# Altium PCB transmitter.PcbDoc
Units mm, origin at the board's own origin, x right, y up, seen from the top; angles counter-clockwise.
Board outline 78.49 x 58.93 mm, 2 copper layers (Top Layer, Bottom Layer); 17 components, 11 nets, 44 pads, 12 vias.
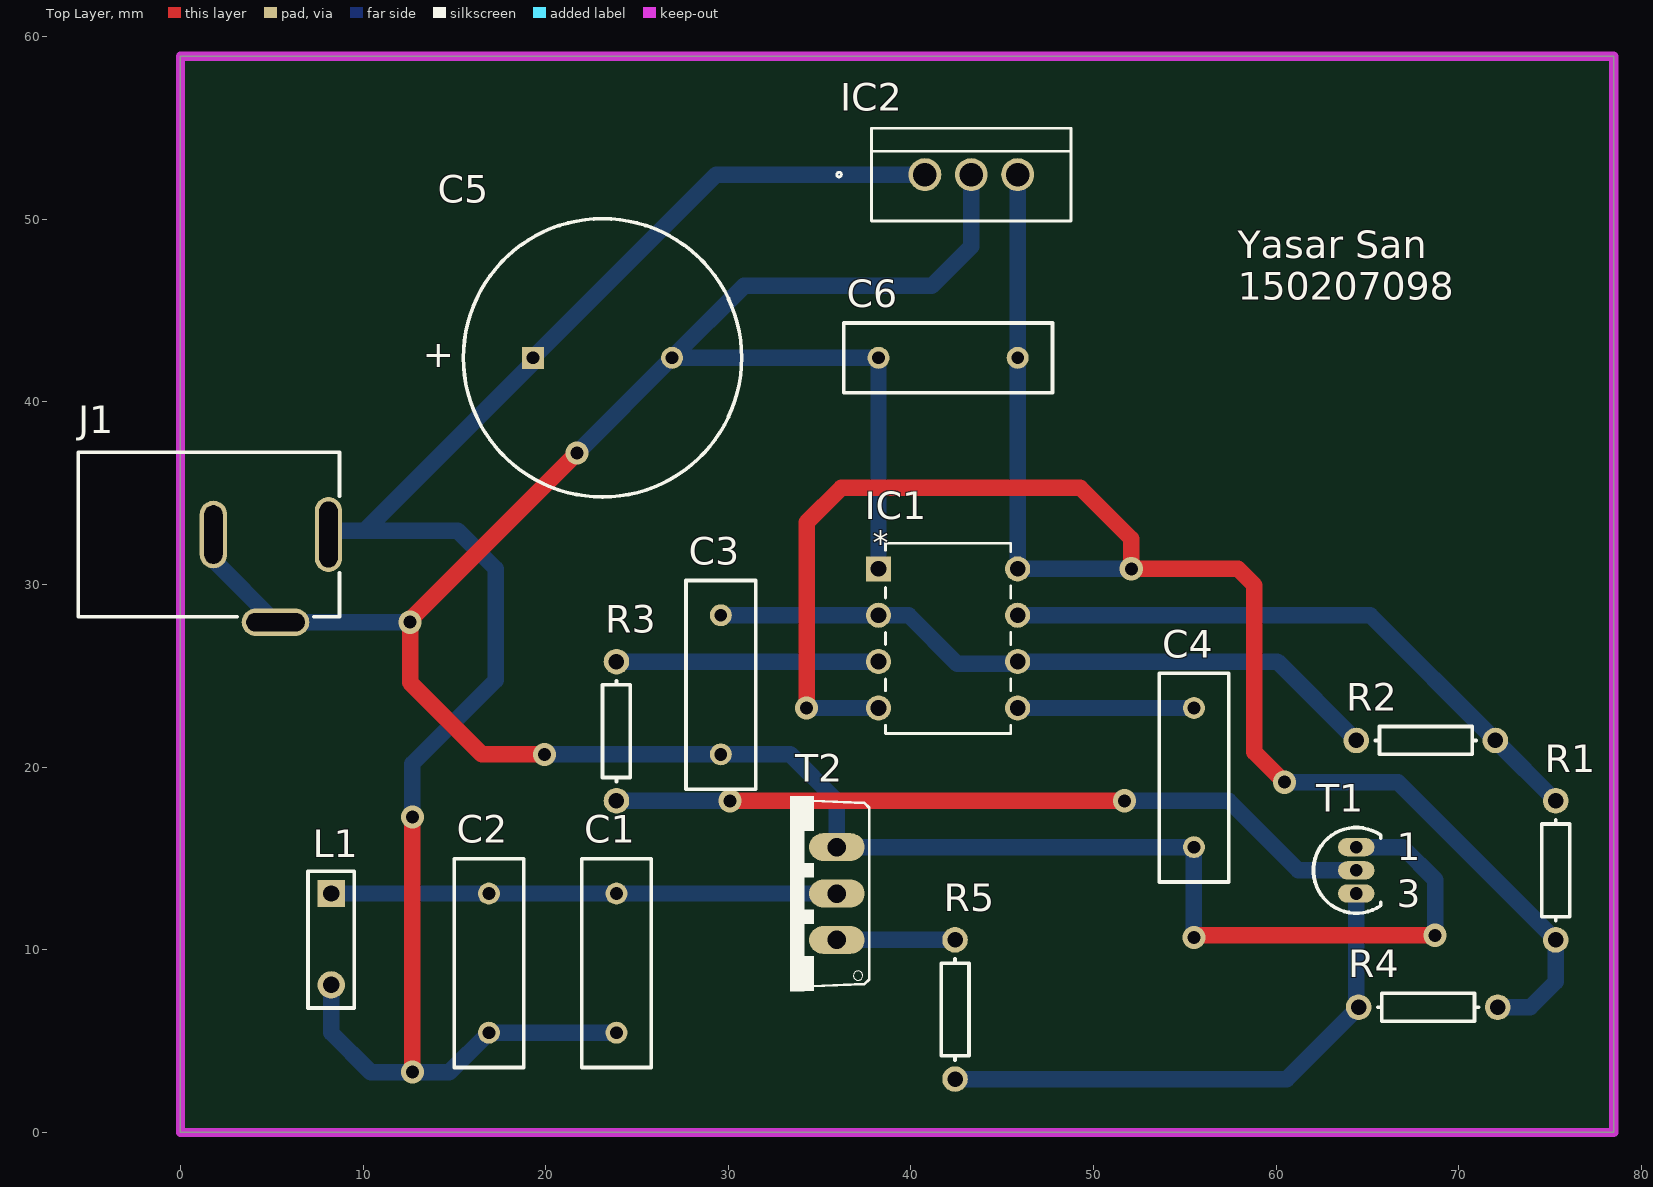
[diagram p0: Top Layer view]
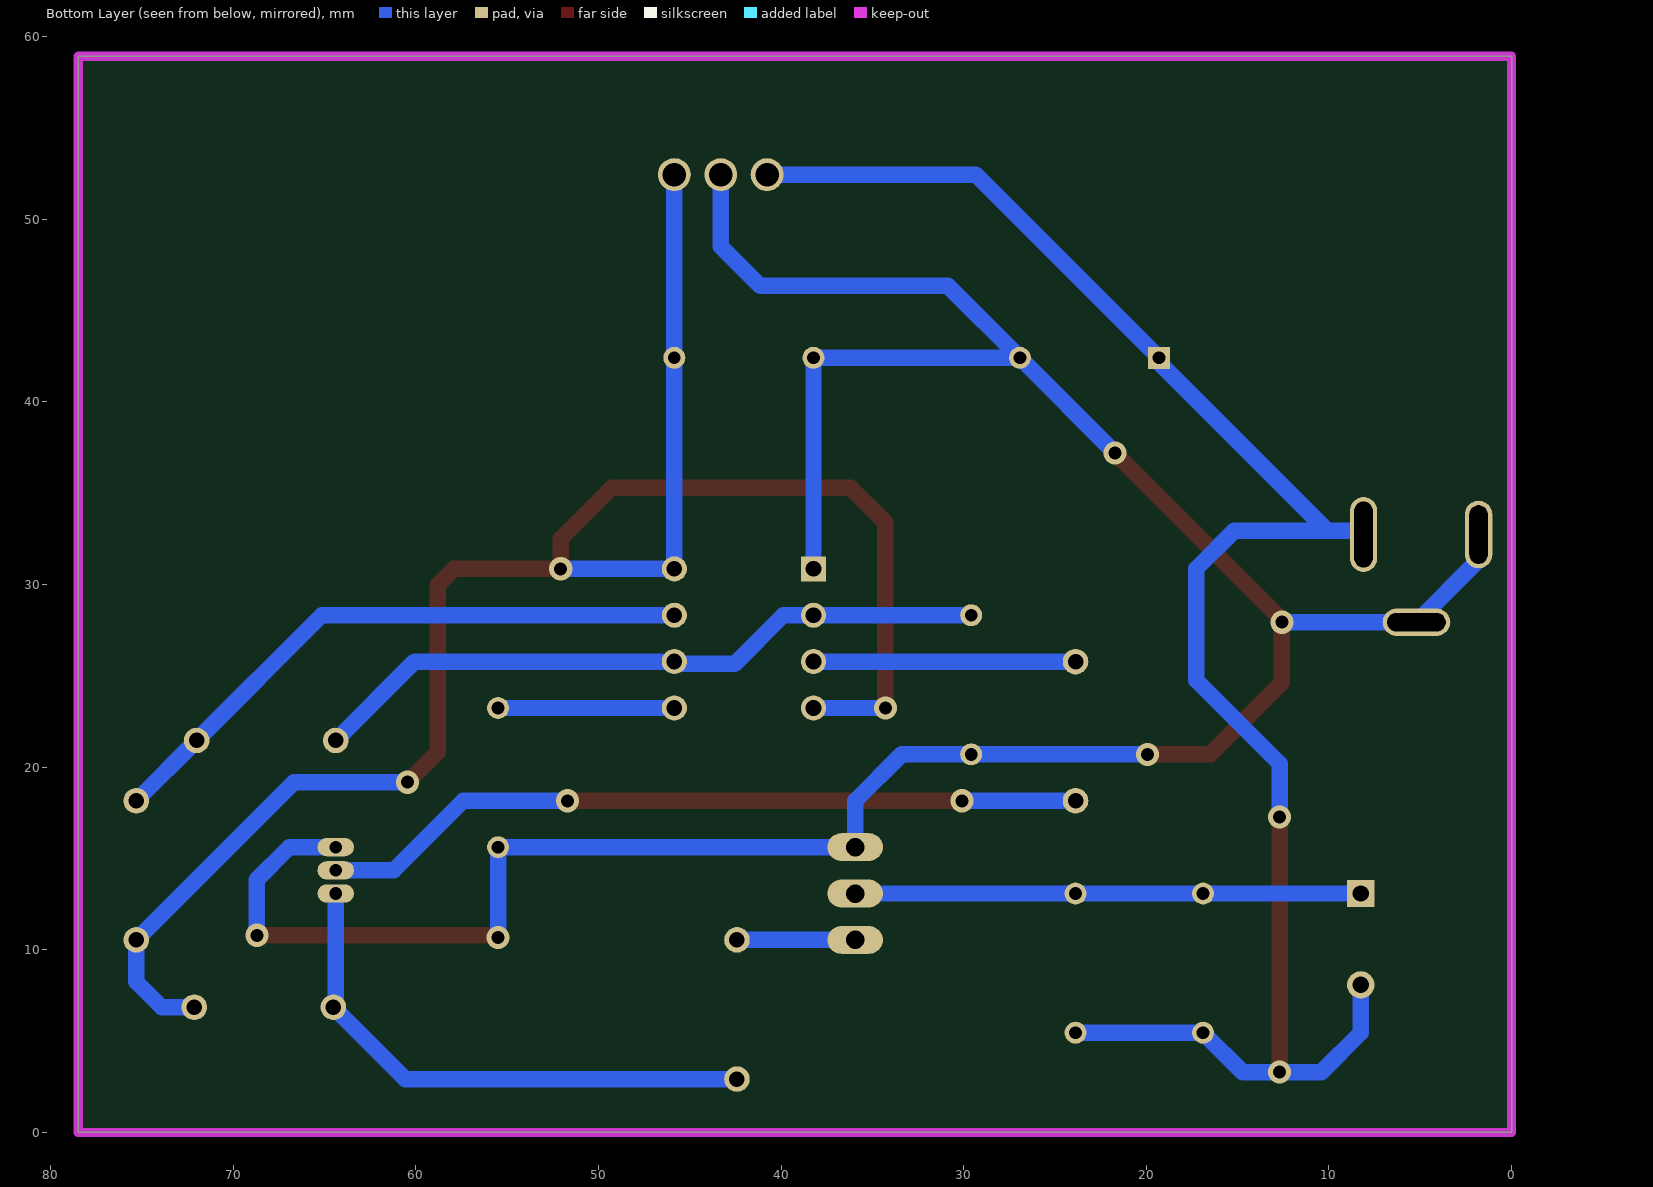
[diagram p1: Bottom Layer view, seen from below]

## Layer stack, top to bottom
Top Solder: solder mask 0.0102, Solder Resist, Dk 3.5
Top Layer: signal copper 0.0356
Dielectric 1: dielectric 0.32, FR-4, Dk 4.8
Bottom Layer: signal copper 0.0356
Bottom Solder: solder mask 0.0102, Solder Resist, Dk 3.5

## Board outline
0,0 78.486,0 78.486,58.928 0,58.928

## Design rules (kind name [scope] priority, off if disabled: settings)
Clearance [All] p1: gap=0.254 ignorepadtopadclearanceinfootprint=FALSE except(0: Arc-Hole Track-Hole SMDPad-Hole THPad-Hole Via-Hole Fill-Hole Poly-Hole Region-Hole Text-Hole)
PolygonConnect [All] p1: connectstyle=Relief reliefconductorwidth=0.254 reliefentries=4 polygonreliefangle="90 Angle" airgapwidth=0.254
RoutingVias [All] p1: holewidth=0.711 width=1.27 viastyle="Through Hole" minholewidth=0.711 minwidth=1.27 maxholewidth=0.711 maxwidth=1.27
SolderMaskExpansion [All] p1: expansion=0.102
Width [All] p1: maxlimit=1.1 minlimit=0.9 preferedwidth=1 minimp=50.000000 maximp=50.000000 favimp=50.000000
30 further rules are at their usual default settings.

## Components (designator, comment, footprint, x,y, rotation, side; value= is the part's Value field where it differs from the comment)
C1 "Cap" RAD-0.3 23.876,9.271 r270 top value=0.1uF
C2 "Cap" RAD-0.3 16.891,9.271 r270 top value=0.1uF
C3 "Cap" RAD-0.3 29.591,24.511 r90 top value=0.01uF
C4 "Cap" RAD-0.3 55.499,19.431 r90 top value=0.01uF
C5 "Cap Pol" RB7.6-15 23.114,42.418 r180 top value="100uF 25V"
C6 "Cap" RAD-0.3 42.037,42.418 r180 top value=0.1uF
IC1 "NE555" DIP8 42.037,27.051 r0 top
IC2 "LM7805CT" TO-220 45.847,52.451 r0 top value=Value
J1 "DCJ250-10-A" DCJ250-10-A_XX-X_revA 1.557,32.74 r270 top
L1 "Inductor" HDR1X2 8.255,10.621 r270 top value=180uH
R1 "Res" AXIAL-0.3 75.311,14.351 r270 top value=1K
R2 "Res" AXIAL-0.3 68.199,21.463 r0 top value=3.3K
R3 "Res" AXIAL-0.3 23.876,21.971 r270 top value=3.3K
R4 "Res" AXIAL-0.3 68.326,6.858 r0 top value=1K
R5 "Res" AXIAL-0.3 42.418,6.731 r90 top value="150 OHM"
T1 "BC547" TO-92 64.389,14.351 r0 top
T2 "IRF540" TO220BV_IRF540(Primary) 33.401,13.081 r90 top

## Footprints (in the part's own frame and the unit in brackets; to place one, negate y for a bottom-side part, rotate by r counter-clockwise, add the part's x,y. Pads: shape width x height; smd on the part's side, far side on the other; paste and mask are expansions set on the pad)
AXIAL-0.3 [mm] "Axial Device, Thru-Hole; 2 Leads; 0.3 in Pin Spacing"
  round 1.4 hole 0.85: 1(-3.81,0) 2(3.81,0)
  silkscreen extent -2.77,-0.76 2.77,0.76
DCJ250-10-A_XX-X_revA [mm] "DC Power Jack, Thru-Hole, Horizontal, with Locating Pegs, D2.5mm"
  oval 4.1x1.5 hole 1 slot 3.6 at 0 deg: 1(0,6.55)
  oval 3.7x1.5 hole 1 slot 3.2 at 0 deg: 2(0,0.25)
  oval 1.5x3.7 hole 1 slot 3.2 at 90 deg: 3(4.8,3.65)
  silkscreen extent -4.5,-7.15 4.5,7.15, body extent -4.5,-7.15 5.05,7.15, height 11
DIP8 [mil]
  rect 54x54 hole 34 mask+0: 1(-150,150)
  round 54 hole 34 mask+0: 2(-150,50) 3(-150,-50) 4(-150,-150) 5(150,-150) 6(150,-50) 7(150,50) 8(150,150)
  silkscreen extent -135,-205 135,205, body extent -160,-200 160,200, height 250
HDR1X2 [mm] "Connector; Header; 2 Position"
  rect 1.5x1.5 hole 0.9: 1(-2.46,0)
  round 1.5 hole 0.9: 2(2.54,0)
  silkscreen extent -3.68,-1.27 3.81,1.27
RAD-0.3 [mm] "Radial Cap, Thru-Hole; 2 Leads; 0.3 in Pin Spacing"
  round 1.2 hole 0.7: 1(-3.81,0) 2(3.81,0)
  silkscreen extent -5.71,-1.91 5.71,1.91
RB7.6-15 [mm] "Polarized Capacitor (Radial); 2 Leads"
  rect 1.2x1.2 hole 0.7: 1(3.81,0)
  round 1.2 hole 0.7: 2(-3.81,0)
  silkscreen extent -7.62,-7.62 7.62,7.62
TO220BV_IRF540(Primary) [mil]
  oval 60x120 hole 40: D(0,-100) G(-100,-100) S(100,-100)
  silkscreen extent -210,-170 210,0
TO-92 [mm] "TO, Flat Index; 3 In-Line, Axial Leads; Body Dia. 4.6mm; Leads 0.41 x 0.39 mm (max)"
  oval 2x1 hole 0.7: 1(0,1.27) 2(0,0) 3(0,-1.27)
  silkscreen extent -2.34,-2.34 1.35,2.34
TO-220 [mil]
  round 71 hole 51 mask+0: 1(-200,0) 2(-100,0) 3(0,0)
  silkscreen extent -390,-100 115,100, body extent -310,-95 110,95, height 750

## Part data
C1 C2 C3 C4 C6: "Capacitor", LatestRevisionDate=17-Jul-2002, LatestRevisionNote="Re-released for DXP Platform.", PackageDescription="Radial Cap, Thru-Hole; 2 Leads; 0.3 in Pin Spacing", PackageReference=RAD-0.3, Published=8-Jun-2000, Publisher="Altium Limited"
C5: library part "Cap Pol1", "Polarized Capacitor (Radial)", LatestRevisionDate=17-Jul-2002, LatestRevisionNote="Re-released for DXP Platform.", PackageDescription="Polarized Capacitor (Radial); 2 Leads", PackageReference=RB7.6-15, Published=8-Jun-2000, Publisher="Altium Limited"
IC1: "Precision timing circuits capable of producing accurate time delays or oscillation", Package="DIP-8 Texas Instruments", Availability=Unavailable, MF="Texas Instruments", MP=NE555, Price=None, SnapEDA_Link=https://www.snapeda.com/parts/NE555/Texas%20Instruments/view-part/?ref=snap
IC2: "Imported", Built_By=EMA_UL_Team, C="Copyright (C) 2015 Accelerated Designs. All rights reserved", Manufacturer_Part_Number=LM7805CT, RefDes=RefDes, Type=DEV, Vendor="Fairchild Semiconductor"
J1: library part DCJ250-10-A_XX-X_revA, "DC Power Jack, Thru-Hole, Horizontal, with Locating Pegs, D2.5mm"
R1 R2 R3 R4 R5: library part Res1, "Resistor", LatestRevisionDate=17-Jul-2002, LatestRevisionNote="Re-released for DXP Platform.", PackageDescription="Axial Device, Thru-Hole; 2 Leads; 0.3 in Pin Spacing", PackageReference=AXIAL-0.3, Published=8-Jun-2000, Publisher="Altium Limited"
T1: "Transistor NPN BC547 PHILIPS miliampere=100 TO92", Package="TO-92 Rochester Electronics", Availability=Unavailable, MF="ON Semiconductor", MP=BC547, Price=None, SnapEDA_Link=https://www.snapeda.com/parts/BC547/ON%20Semiconductor/view-part/?ref=snap
T2: Package="TO-220 ON Semiconductor", Availability=Unavailable, MF="Vishay Siliconix", MP=IRF540, Price=None, SnapEDA_Link=https://www.snapeda.com/parts/IRF540/Vishay%20Siliconix/view-part/?ref=snap
L1: Code_IEC=1005, Code_JEITA=0402, LatestRevisionDate=29-May-2009, LatestRevisionNote="IPC-7351 Footprint Added.", PackageDescription="Chip Inductor", PackageReference=0402-A, Published=8-Jun-2000, Publisher="Altium Limited"

## Via types
v1: diameter 1.27, hole 0.711, Top Layer to Bottom Layer, 12 vias

## Nets (pads, with @x,y where several pads share a name; then routed paths per layer and width w, separated by ;. In a path a pad name is that pad's centre, name@x,y a point inside that pad or via, vN(x,y) a via of type N, cw(c..) or ccw(c..) an arc to the next point about the centre after c; other vN are vias at no path point)
GND: C3.1 C4.1 C5.2 C6.2 IC1.1 IC2.2 J1.2 J1.3 T1.1 T2.S | length 157.5
  Top Layer w0.9: v1(19.939,20.701) 16.51,20.701 12.573,24.638 v1(12.573,27.94) 12.573,28.067 v1(21.717,37.211) ; v1(55.499,10.668) 55.626,10.795 v1(68.707,10.795)
  Bottom Layer w0.9: J1.2 1.807,31.34 J1.3 v1(12.573,27.94) ; v1(19.939,20.701) C3.1 33.401,20.701 35.941,18.161 T2.S C4.1 v1(55.499,10.668) ; v1(21.717,37.211) C5.2 ; IC1.1 C6.2 C5.2 ; IC2.2 43.307,48.514 41.148,46.355 30.861,46.355 C5.2 ; T1.1 66.929,15.621 68.707,13.843 v1(68.707,10.795)
NetC1_1: C1.1 C2.1 L1.1 T2.D | length 27.7
  Bottom Layer w0.9: L1.1 C2.1 C1.1 T2.D
NetC1_2: C1.2 C2.2 C5.1 IC2.1 J1.1 L1.2 | length 98.4
  Top Layer w0.9: v1(12.7,3.302) v1(12.7,17.272)
  Bottom Layer w0.9: J1.1@8.107,32.94 10.08,32.94 ; L1.2 8.255,5.461 10.414,3.302 v1(12.7,3.302) 14.732,3.302 C2.2 C1.2 ; v1(12.7,17.272) 12.7,20.193 17.272,24.765 17.272,30.861 15.193,32.94 10.08,32.94 ; IC2.1 29.337,52.451 C5.1 19.304,42.164 10.08,32.94
NetC3_2: C3.2 IC1.2 IC1.6 R2.1 | length 37.7
  Bottom Layer w0.9: C3.2 IC1.2 39.878,28.321 42.545,25.654 45.72,25.654 IC1.6 60.071,25.781 R2.1
NetC4_2: C4.2 IC1.5 | length 9.7
  Bottom Layer w0.9: IC1.5 C4.2
NetC6_1: C6.1 IC1.4 IC1.8 IC2.3 R1.2 R4.2 | length 106.3
  Top Layer w0.9: v1(34.29,23.241) 34.29,33.401 36.195,35.306 49.276,35.306 52.07,32.512 v1(52.07,30.861) 57.912,30.861 58.801,29.972 58.801,20.828 v1(60.452,19.177)
  Bottom Layer w0.9: v1(34.29,23.241) IC1.4 ; IC2.3 C6.1 IC1.8 v1(52.07,30.861) ; v1(60.452,19.177) 66.675,19.177 R1.2 75.311,8.255 73.914,6.858 R4.2
NetIC1_3: IC1.3 R3.1 | length 14.4
  Bottom Layer w0.9: R3.1 IC1.3
NetIC1_7: IC1.7 R1.1 R2.2 | length 33.7
  Bottom Layer w0.9: IC1.7 65.151,28.321 R2.2 R1.1
NetR3_2: R3.2 T1.2 | length 42.1
  Top Layer w0.9: v1(30.099,18.161) v1(51.689,18.161)
  Bottom Layer w0.9: R3.2 v1(30.099,18.161) ; v1(51.689,18.161) 57.404,18.161 61.214,14.351 T1.2
NetR4_1: R4.1 R5.1 T1.3 | length 30
  Bottom Layer w0.9: R5.1 60.579,2.921 R4.1 64.389,6.985 T1.3
NetR5_2: R5.2 T2.G | length 6.5
  Bottom Layer w0.9: T2.G R5.2

## Keep-outs
Keep-Out Layer:
  lines w0.508: 0,0 3.429,0 78.486,0 78.486,58.928 3.429,58.928 0,58.928 0,0

## Silkscreen, mask and mechanical layers (free items; w line width, h text height)
Top Overlay:
  text "Yasar San / 150207098" at 57.912,45.593 h1.52

## Text inside footprints (layer, text, board x,y; h text height)
C5: Top Overlay "+" at 14.982,43.155 h1.5 r180
IC1: Top Overlay "*" at 37.91,31.674 h1.27; Mechanical 13 "*" at 38.672,30.226 h1.27
IC2: Mechanical 13 "TAB" at 42.831,53.914 h0.64
T1: Top Overlay "3" at 66.613,12.316 h1.5; Top Overlay "1" at 66.613,14.911 h1.5